# Altium PCB LPF.PcbDoc
Units mm, origin at the board's own origin, x right, y up, seen from the top; angles counter-clockwise.
Board outline 88 x 63.5 mm, 4 copper layers (Top Layer, Mid-Layer 1, Internal Plane 1, Bottom Layer), stack 1.494 mm thick; 15 components, 11 nets, 28 pads, 6 vias.
Unrouted connection lines stored in the file: 2.
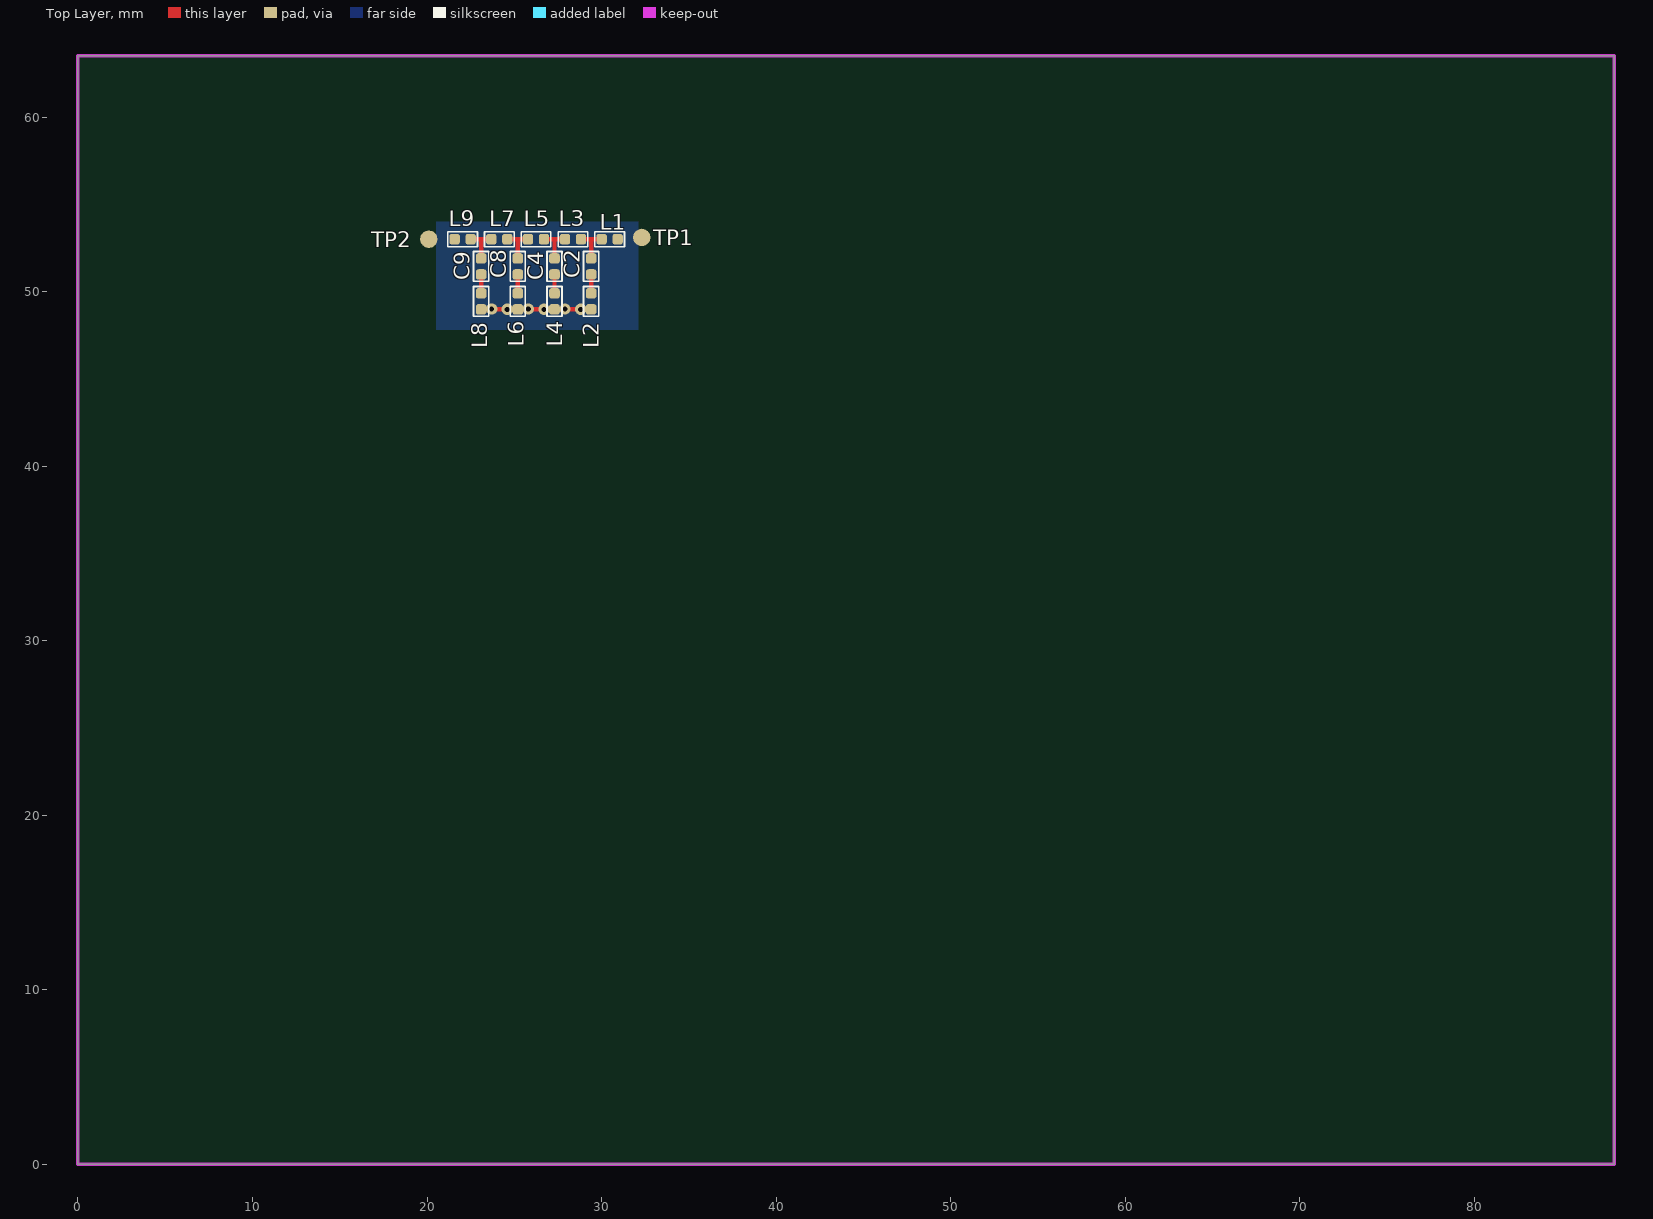
[diagram p0: Top Layer view]
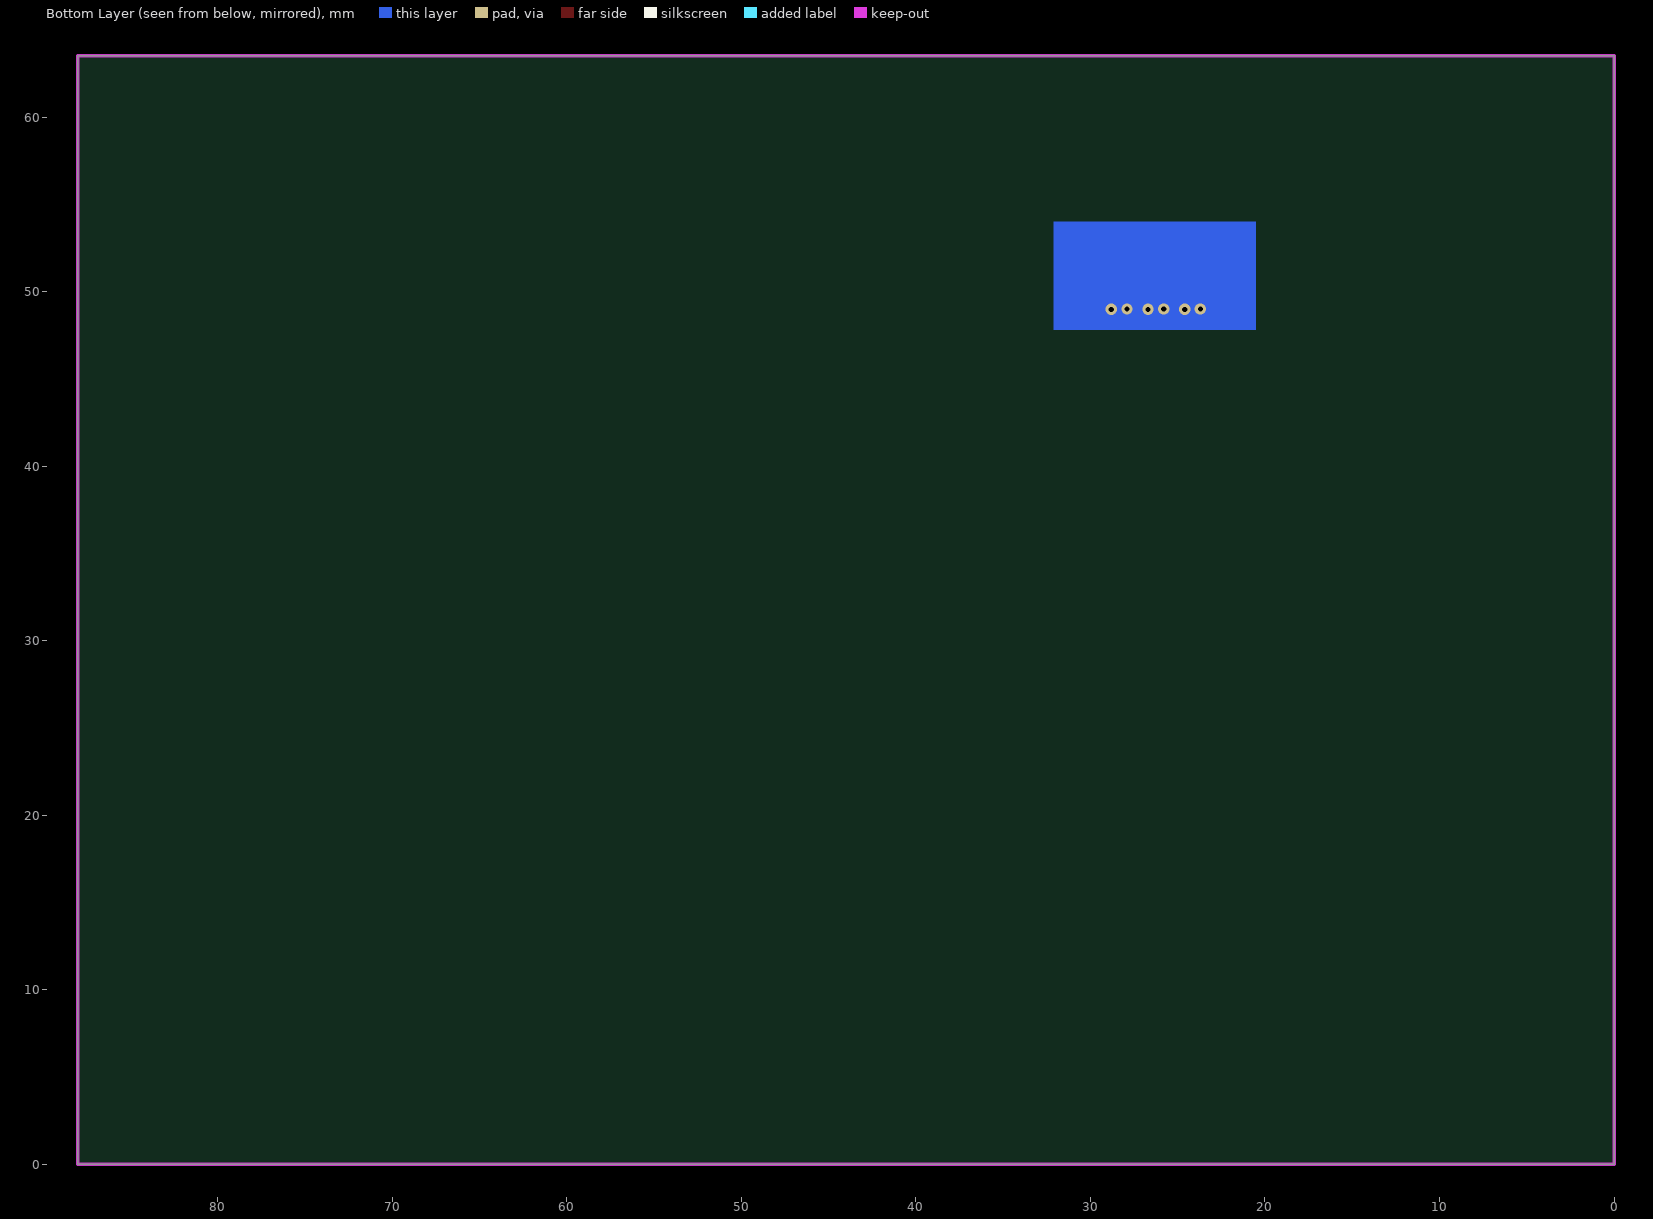
[diagram p1: Bottom Layer view, seen from below]
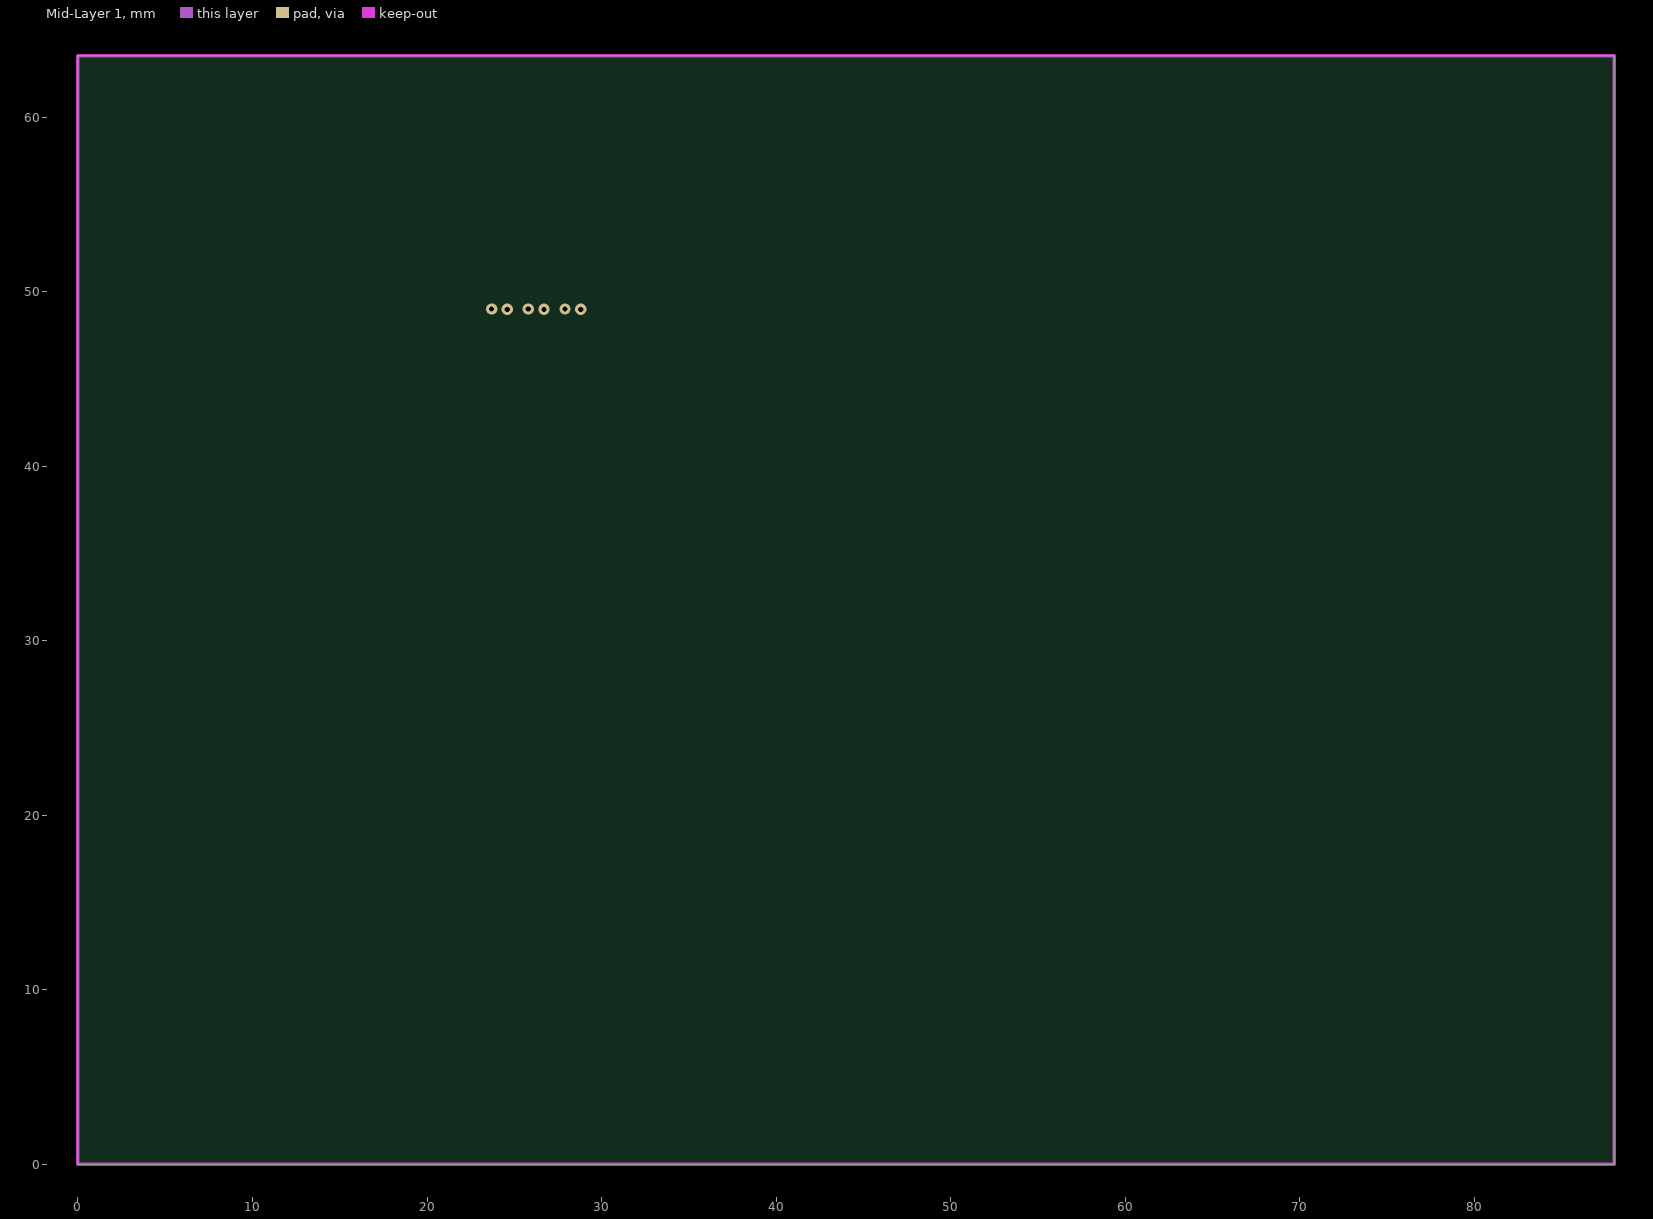
[diagram p2: Mid-Layer 1]
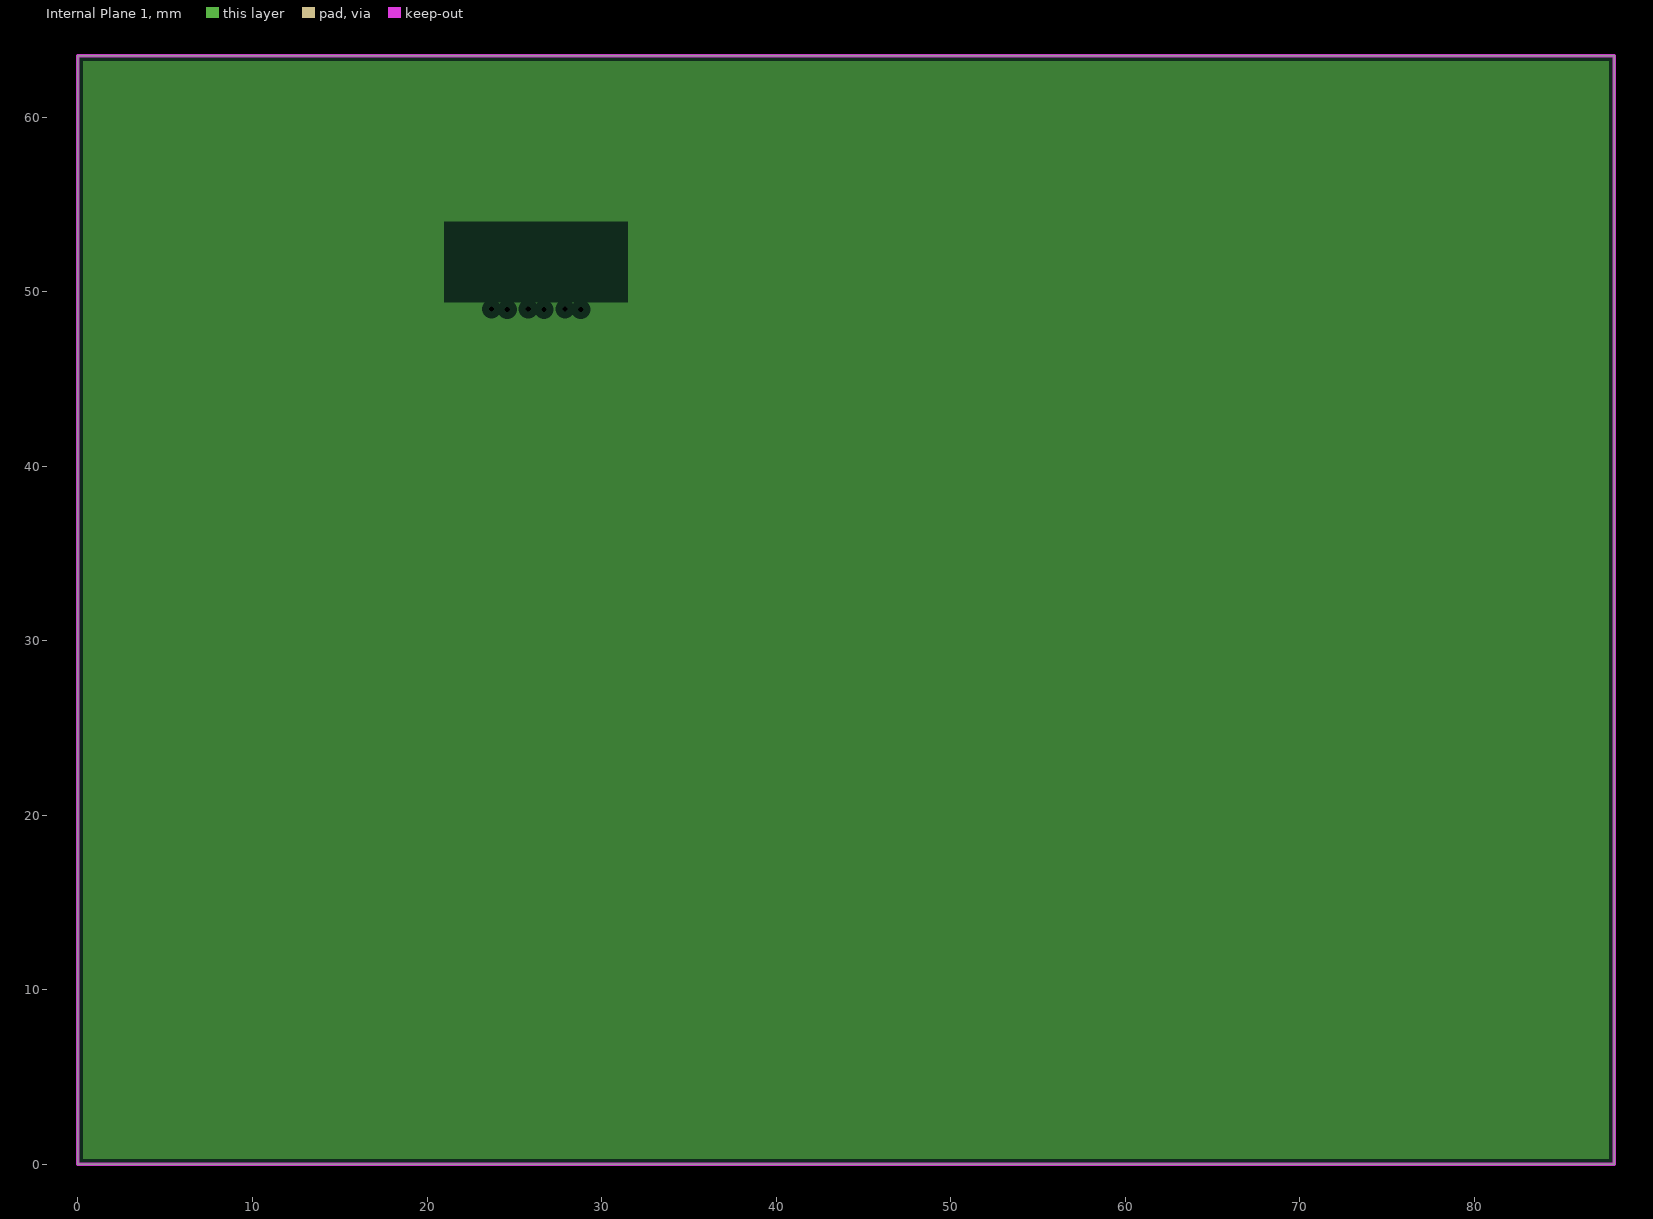
[diagram p3: Internal Plane 1, clearances drawn from the general rule]

## Layer stack, top to bottom
Top Solder: solder mask 0.0102, Solder Resist, Dk 3.5
Top Layer: signal copper 0.036
Dielectric1: prepreg 0.11, FR-4, Dk 4.2
Mid-Layer 1: signal copper 0.036
Dielectric2: core 1.13, FR-4, Dk 4.2
Internal Plane 1: plane copper 0.036
Dielectric 3: prepreg 0.11, FR-4, Dk 4.2
Bottom Layer: signal copper 0.036
Bottom Solder: solder mask 0.0102, Solder Resist, Dk 3.5

## Board outline
0,0 88,0 88,63.5 0,63.5

## Design rules (kind name [scope] priority, off if disabled: settings)
Clearance Clearance-xPP-xTP-xTT [All] p1: gap=0.2 ignorepadtopadclearanceinfootprint=TRUE
ComponentClearance [All] p1: gap=0.25 collisioncheckmode=3 verticalgap=0.25 showdistances=FALSE
DiffPairsRouting [All] p1: maxlimit=0.25 minlimit=0.25 mostfreqgap=0.25 toplayer_minwidth=0.381 toplayer_maxwidth=0.381 toplayer_prefwidth=0.381 midlayer1_minwidth=0.381 midlayer1_maxwidth=0.381 midlayer1_prefwidth=0.381 bottomlayer_minwidth=0.381 bottomlayer_maxwidth=0.381 bottomlayer_prefwidth=0.381 maxuncoupledlength=12.5
Height [All] p1: minheight=0 maxheight=35 prefheight=12.5
HoleSize HoleSize-PTH [All] p1: absolutevalues=TRUE maxlimit=2 minlimit=0.25 maxpercent=80.000 minpercent=20.000
HoleToHoleClearance [All] p1: gap=0.15 allowstackedmicrovias=TRUE
MinimumAnnularRing "Minimum IAR  >0.45mm" [((ObjectKind = 'Pad') OR (ObjectKind = 'Via')) And (Layer = 'MultiLayer') And (HoleDiameter > AsMM(0.45))] p1: minimumring=0.25 // minimum inner annular ring for pads > 0.45mm finished hole size
MinimumAnnularRing "Minimum IAR <=0.45mm" [((ObjectKind = 'Pad') OR (ObjectKind = 'Via')) And (Layer = 'MultiLayer') And (HoleDiameter <= AsMM(0.45))] p2: minimumring=0.225 // minimum inner annular ring for pads <= 0.45mm finished hole size
MinimumSolderMaskSliver [All] p1: minsoldermaskwidth=0.1
PlaneClearance PlaneClearance-IPI [All] p1: clearance=0.4
PlaneConnect [All] p1: pad.planeconnectstyle=Relief pad.reliefexpansion=0.5 pad.reliefentries=4 pad.reliefconductorwidth=1 pad.reliefairgap=0.3 via.planeconnectstyle=Direct via.reliefexpansion=0.4 via.reliefentries=4 via.reliefconductorwidth=0.2 via.reliefairgap=0.2
PolygonConnect PolygonConnect-xTW [All] p1: connectstyle=Direct reliefconductorwidth=0.2 reliefentries=4 polygonreliefangle="90 Angle" airgapwidth=0.3
RoutingCorners [All] p1: cornerstyle=45-Degree minsetback=2.5 maxsetback=2.5
RoutingVias Via [All] p1: holewidth=0.3 width=0.62 viastyle="Through Hole" minholewidth=0.2 minwidth=0.55 maxholewidth=0.5 maxwidth=1.4 // All
SilkToSilkClearance [All] p1: silktosilkclearance=0.2
SilkToSolderMaskClearance SilkscreenOverComponentPads [IsPad] p1: minsilkscreentomaskgap=0.2 clearancetoexposedcopper=TRUE
SolderMaskExpansion ViaSolderMask [IsVia] p1: expansion=0.1 istentingtop=TRUE
SolderMaskExpansion [All] p2: expansion=0.1 istentingtop=FALSE
Width Width-xTW [All] p1: maxlimit=3 minlimit=0.2 preferedwidth=0.25
19 further rules are at their usual default settings.

## Components (designator, comment, footprint, x,y, rotation, side; value= is the part's Value field where it differs from the comment)
C2 "16p" C0402 29.4,51.44 r270 top
C4 "11p" C0402 27.3,51.44 r270 top
C8 "10p" C0402 25.2,51.44 r270 top
C9 "13p" C0402 23.1,51.44 r270 top
L1 "43n" R0402 30.46,53 r180 top
L2 "3.9n" R0402 29.4,49.44 r270 top
L3 "56n" R0402 28.36,53 r180 top
L4 "24n" R0402 27.3,49.44 r270 top
L5 "43n" R0402 26.24,53 r180 top
L6 "33n" R0402 25.2,49.44 r270 top
L7 "47n" R0402 24.14,53 r180 top
L8 "15n" R0402 23.1,49.44 r270 top
L9 "33n" R0402 22.04,53 r180 top
TP1 "TP1mm" TP1mm 32.3,53.1 r270 top
TP2 "TP1mm" TP1mm 20.1,53 r270 top

## Footprints (in the part's own frame and the unit in brackets; to place one, negate y for a bottom-side part, rotate by r counter-clockwise, add the part's x,y. Pads: shape width x height; smd on the part's side, far side on the other; paste and mask are expansions set on the pad)
C0402 [mm] "C0402"
  rrect50% 0.6x0.61 smd mask+0.025: 1(-0.46,0) 2(0.46,0)
  silkscreen extent -0.85,-0.43 0.85,0.43, body extent -0.5,-0.3 0.5,0.3, height 0.5
R0402 [mm] "R0402"
  rrect50% 0.6x0.61 smd mask+0.025: 1(-0.46,0) 2(0.46,0)
  silkscreen extent -0.85,-0.43 0.85,0.43, body extent -0.6,-0.3 0.6,0.3, height 0.4
TP1mm [mm] "Test Point 1mm"
  round 1 smd paste-0.75 mask+0.025: 1(0,0)
  body extent -0.5,-0.5 0.5,0.5, height 0.01

## Part data
C2: library part 1n_50V_0402, "16p 50V 0402", Part Number=CQ0402FRNPO9BN160, Voltage=50V
C4: library part 1n_50V_0402, "11p 50V 0402", Part Number=CC0402JRNPO9BN110, Voltage=50V
C8: library part 1n_50V_0402, "10p 50V 0402", Part Number=CQ0402FRNPO9BN100, Voltage=50V
C9: library part 1n_50V_0402, "13p 50V 0402", Part Number=CC0402JRNPO9BN130, Voltage=50V
L1 L5: library part 0402HC-3N9ECTS, "43n 0402 0.7Ohm", Part Number=0402HM-430EGTS, R=700m
L2: library part 0402HC-3N9ECTS, "3.9n 0402", Part Number=0402HC-3N9ECTS, R=40m
L3: library part 0402HC-3N9ECTS, "56n 0402 1.17Ohm", Part Number=0402HM-560EGTS, R=1.17Ohm
L4: library part 0402HC-3N9ECTS, "24n 0402 0.53Ohm", Part Number=LQW15AN24NJ00D, R=520m
L6 L9: library part 0402HC-3N9ECTS, "33n 0402 0.63Ohm", Part Number=LQW15AN33NJ00D, R=630m
L7: library part 0402HC-3N9ECTS, "47n 0402 0.72Ohm", Part Number=LQG15HS47NJ02D, R=0.72
L8: library part 0402HC-3N9ECTS, "15n 0402 0.16Ohm", Part Number=LQW15AN15NG00D, R=40m

## Via types
v1: diameter 0.65, hole 0.3, Top Layer to Bottom Layer, tented both sides, 6 vias

## Nets (pads, with @x,y where several pads share a name; then routed paths per layer and width w, separated by ;. In a path a pad name is that pad's centre, name@x,y a point inside that pad or via, vN(x,y) a via of type N, cw(c..) or ccw(c..) an arc to the next point about the centre after c; other vN are vias at no path point)
GND: L2.2 L4.2 L6.2 L8.2 | length 9.2
  Top Layer w0.25: L8.2 v1(24.6,48.98) ; v1@24.7,48.98 v1(24.6,48.98) ; v1@26.8,48.98 v1(26.7,48.98) ; L2.2 v1(28.8,48.98) L4.2 v1(26.7,48.98) ; v1(24.6,48.98) L6.2 v1(26.7,48.98)
  Bottom Layer w0.25: v1(23.7,49) 23.72,48.98 v1(24.6,48.98) ; v1(25.8,49) 25.82,48.98 v1(26.7,48.98) ; v1(27.9,49) 28,49 28.02,48.98 v1(28.8,48.98)
IN: L1.1 TP1.1
NetC2_1: C2.1 L1.2 L3.1 | length 2.3
  Top Layer w0.25: L3.1 29.4,53 ; C2.1 29.4,53 ; L1.2 29.4,53
NetC2_2: C2.2 L2.1 | length 1.1
  Top Layer w0.25: L2.1 C2.2
NetC4_1: C4.1 L3.2 L5.1 | length 2.3
  Top Layer w0.25: L5.1 27.3,53 ; C4.1 27.3,53 ; L3.2 27.3,53
NetC4_2: C4.2 L4.1 | length 1.1
  Top Layer w0.25: L4.1 C4.2
NetC8_1: C8.1 L5.2 L7.1 | length 2.3
  Top Layer w0.25: L7.1 25.2,53 ; C8.1 25.2,53 ; L5.2 25.2,53
NetC8_2: C8.2 L6.1 | length 1.1
  Top Layer w0.25: L6.1 C8.2
NetC9_1: C9.1 L7.2 L9.1 | length 2.3
  Top Layer w0.25: L9.1 23.1,53 ; C9.1 23.1,53 ; L7.2 23.1,53
NetC9_2: C9.2 L8.1 | length 1.1
  Top Layer w0.25: L8.1 C9.2
OUT: L9.2 TP2.1

## Polygon pours and split planes (outlines as drawn)
no net on Internal Plane 1 (split plane): 87.699,0.301 0.301,0.301 0.301,63.199 87.699,63.199

## Keep-outs
Keep-Out Layer:
  the board outline again, w0.2

## Other copper
Top Layer:
  text "TOP LAYER" at 26.9,79.2 h4
Mid-Layer 1:
  pour cut-out: 21,54 21,49.4 31.5,49.4 31.5,54
  text "INTERNAL SIGNAL LAYER" at 6.5,79.2 h4
Bottom Layer:
  rectangle net GND: 20.5,47.8 32.1,54
  text "BOTTOM LAYER" at 23.6,79.2 h4
Internal Plane 1 (plane layer: these items are gaps in the copper):
  pour cut-out: 21,54 21,49.4 31.5,49.4 31.5,54
  text "INTERNAL PLANE, NEGATIVE LAYER" at -12.4,79.2 h4

## Silkscreen, mask and mechanical layers (free items; w line width, h text height)
TOP BODY 1:
Drill Drawing:
  text "There is no copper under the filter" at 12.9,57.433 h1
  text "Only on the bottom side" at 16.1,55.333 h1
  text "Four layers" at 20.3,27.1 h5.08